# Altium PCB Development board.PcbDoc
Units mm, origin at the board's own origin, x right, y up, seen from the top; angles counter-clockwise.
Board outline 152.4 x 101.6 mm, 2 copper layers (Top Layer, Bottom Layer); 18 components, 42 nets, 183 pads, 9 vias.
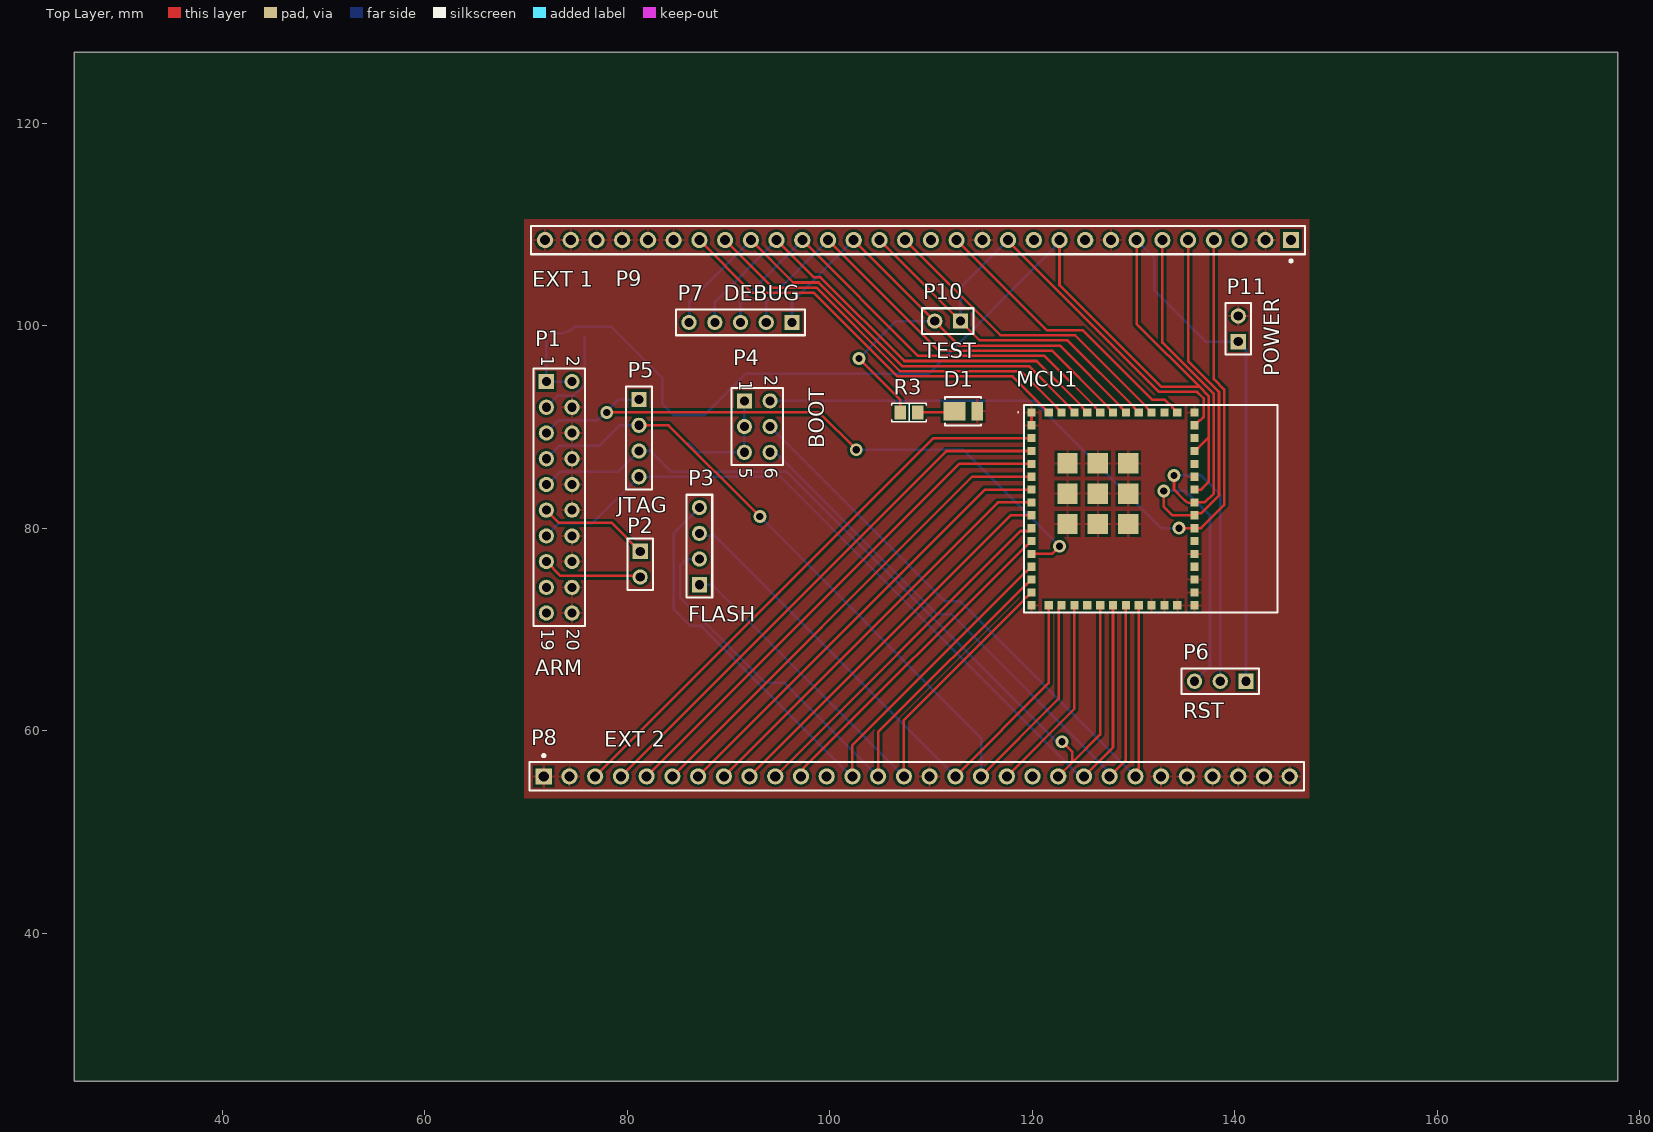
[diagram p0: Top Layer view]
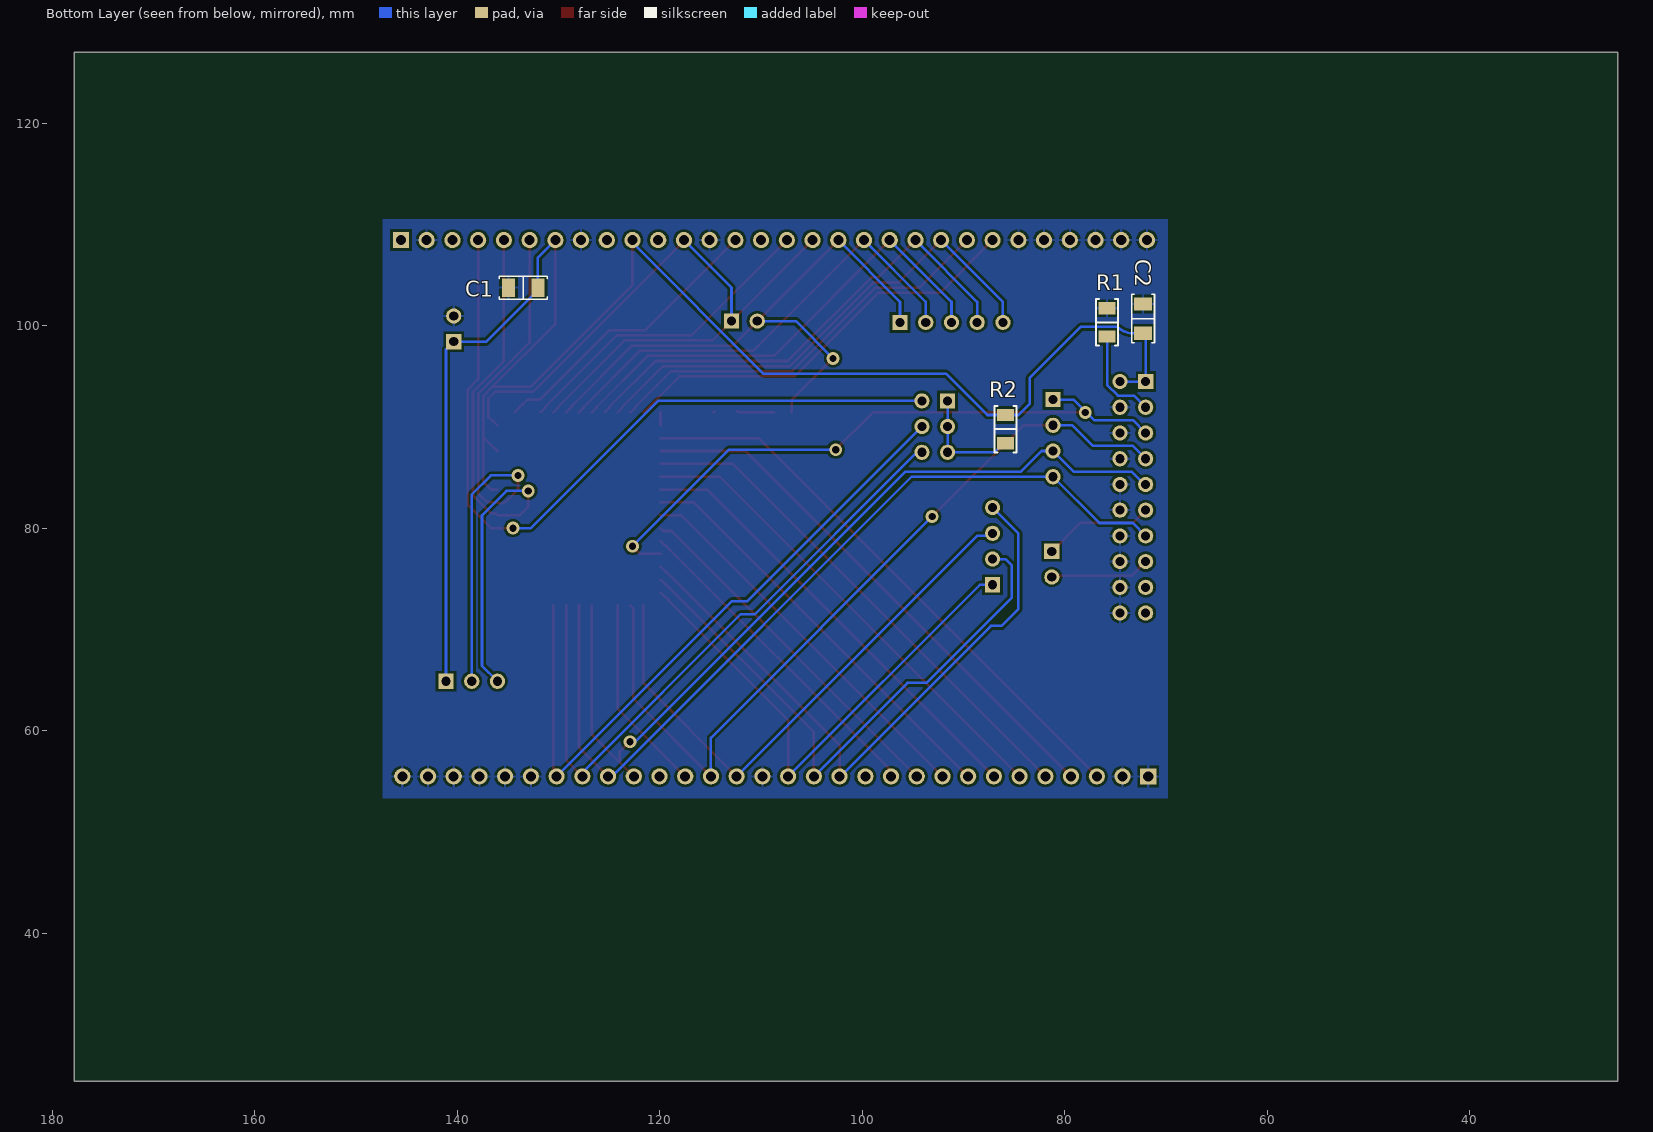
[diagram p1: Bottom Layer view, seen from below]
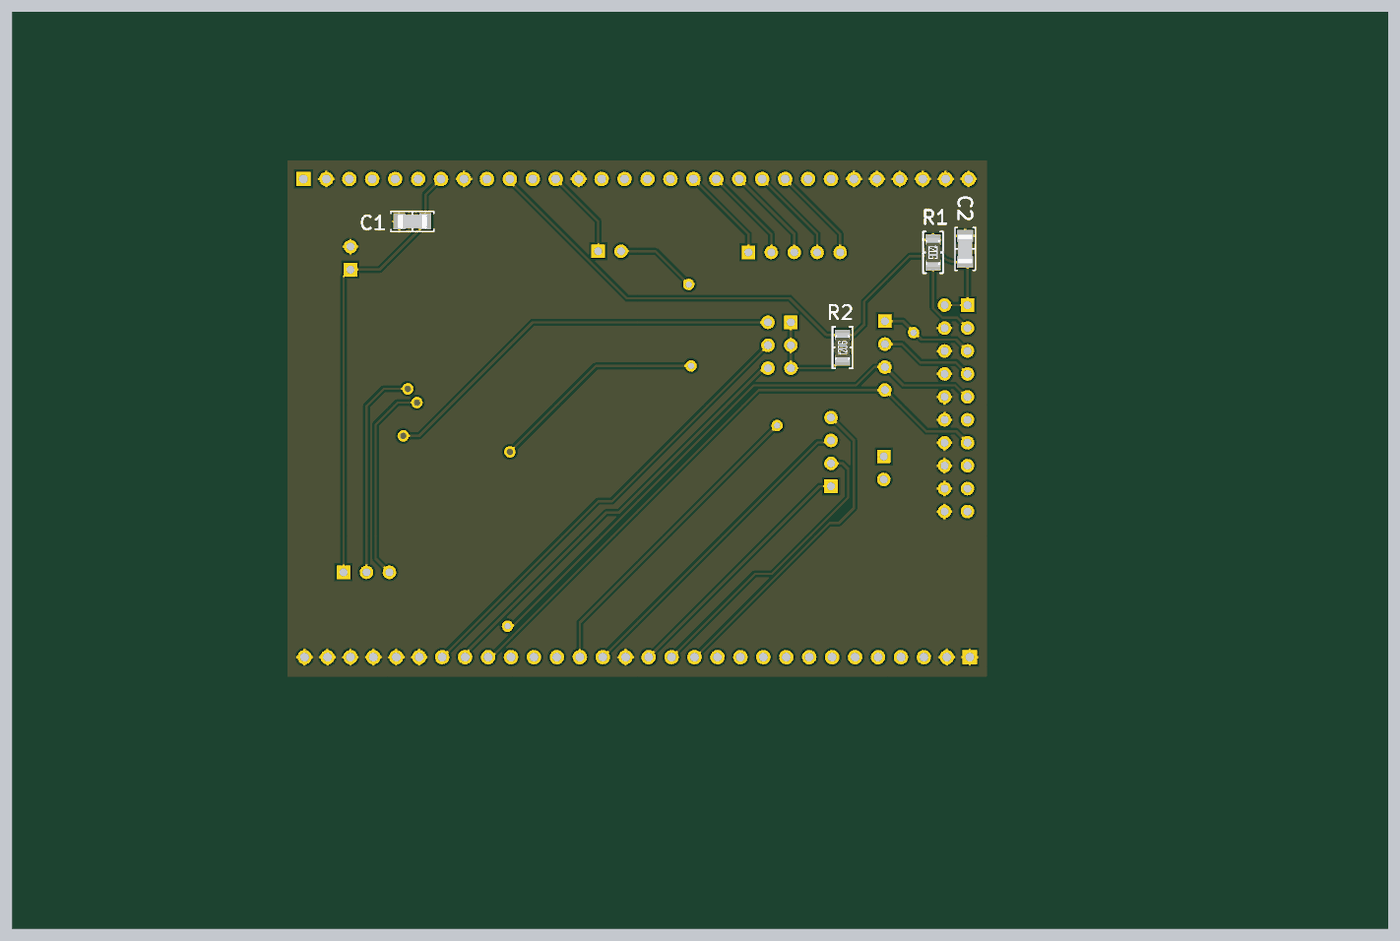
[diagram p2: 3D render of the assembled board from below, using the file's embedded part models]

## Layer stack, top to bottom
Top Solder: solder mask 0.0102, Solder Resist, Dk 3.5
Top Layer: signal copper 0.0356
Dielectric 1: dielectric 0.32, FR-4, Dk 4.8
Bottom Layer: signal copper 0.0356
Bottom Solder: solder mask 0.0102, Solder Resist, Dk 3.5

## Board outline
25.4,25.4 177.8,25.4 177.8,127 25.4,127

## Design rules (kind name [scope] priority, off if disabled: settings)
BoardOutlineClearance [All] p1: gap=0.2 ignorepadtopadclearanceinfootprint=FALSE except(0.4: Arc-SplitBarrior Arc-SplitContinuation Track-SplitBarrior Track-SplitContinuation SMDPad-SplitBarrior SMDPad-SplitContinuation THPad-SplitBarrior THPad-SplitContinuation Via-SplitBarrior Via-SplitContinuation Fill-SplitBarrior Fill-SplitContinuation Poly-SplitBarrior Poly-SplitContinuation Region-SplitBarrior Region-SplitContinuation Text-SplitBarrior Text-SplitContinuation)
Clearance "Clearance Bottom Layer" [OnLayer('Bottom Layer')] p1: gap=0.203 ignorepadtopadclearanceinfootprint=TRUE except(0.254: Arc-Text Track-Text SMDPad-Text THPad-Text Via-Text Fill-Text Poly-Text Region-Text Text-Text)
Clearance "Clearance Top Layer" [OnLayer('Top Layer')] p2: gap=0.203 ignorepadtopadclearanceinfootprint=TRUE except(0.254: Arc-Text Track-Text SMDPad-Text THPad-Text Via-Text Fill-Text Poly-Text Region-Text Text-Text)
Clearance [All] p3: gap=0.2 ignorepadtopadclearanceinfootprint=FALSE except(0.089: Arc-Arc Arc-Track Arc-SMDPad Track-Track Track-SMDPad SMDPad-SMDPad; 0.127: Arc-Via Track-Via SMDPad-Via THPad-Via Via-Via; 0.254: Arc-Text Track-Text SMDPad-Text THPad-Text Via-Text Fill-Text Poly-Text Region-Text Text-Text)
HoleSize [All] p1: absolutevalues=TRUE maxlimit=6.3 minlimit=0.2 maxpercent=80.000 minpercent=20.000
MinimumAnnularRing [All] p1: minimumring=0.076
MinimumSolderMaskSliver [All] p1: minsoldermaskwidth=0.1
PolygonConnect PolygonConnect_1 [All] p1: thpad.connectstyle=Relief thpad.reliefconductorwidth=0.508 thpad.reliefentries=4 thpad.polygonreliefangle="90 Angle" thpad.airgapwidth=0.254 smdpad.connectstyle=Relief smdpad.reliefconductorwidth=0.508 smdpad.reliefentries=4 smdpad.polygonreliefangle="90 Angle" smdpad.airgapwidth=0.254 via.connectstyle=Direct via.reliefconductorwidth=0.508 via.reliefentries=4 via.polygonreliefangle="90 Angle" via.airgapwidth=0.254
RoutingCorners [All] p1: cornerstyle=Round minsetback=2.54 maxsetback=2.54
RoutingVias [All] p1: holewidth=0.5 width=1 viastyle="Through Hole" minholewidth=0.2 minwidth=0.45 maxholewidth=1 maxwidth=2
SilkToSilkClearance [All] p1: silktosilkclearance=0.1
SilkToSolderMaskClearance [IsPad] p1: minsilkscreentomaskgap=0.1 clearancetoexposedcopper=TRUE
SolderMaskExpansion [All] p1: expansion=0.102 istentingtop=FALSE
Width [All] p1: maxlimit=2.54 minlimit=0.089 preferedwidth=0.381
25 further rules are at their usual default settings.

## Components (designator, comment, footprint, x,y, rotation, side; value= is the part's Value field where it differs from the comment)
C1 "0.1 µF" "CAP 1206_3216 - 0.8MM" 133.477,103.759 r180 bottom
C2 "0.1 µF" "CAP 1206_3216 - 0.8MM" 72.263,100.711 r270 bottom
D1 "RED" "CREE J 2835" 113.284,91.567 r180 top
MCU1 "CC3235MODASM2MONR" CC3235MODASF12MONR 131.686,81.915 r0 top
P1 "ARM" HDR2X10 72.009,94.488 r270 top
P2 "Header 2" HDR1X2 81.28,77.724 r270 top
P3 "FLASH" HDR1X4 87.122,74.422 r90 top
P4 "BOOT" HDR2X3 91.567,92.583 r270 top
P5 "JTAG" HDR1X4 81.153,92.71 r270 top
P6 "RST" HDR1X3 141.097,64.897 r180 top
P7 "DEBUG" HDR1X5 96.266,100.33 r180 top
P8 "EXT 2" HDR1X30 71.755,55.499 r0 top
P9 "EXT 1" HDR1X30 145.542,108.458 r180 top
P10 "TEST" HDR1X2 112.903,100.457 r180 top
P11 "POWER" HDR1X2 140.335,98.425 r90 top
R1 "10k" "RES 1206_3216" 75.819,100.33 r270 bottom value="1 kOhms"
R2 "10k" "RES 1206_3216" 85.852,89.789 r90 bottom value="1 kOhms"
R3 "1k" "RES 0805_2012" 107.823,91.44 r180 top

## Footprints (in the part's own frame and the unit in brackets; to place one, negate y for a bottom-side part, rotate by r counter-clockwise, add the part's x,y. Pads: shape width x height; smd on the part's side, far side on the other; paste and mask are expansions set on the pad)
"CAP 1206_3216 - 0.8MM" [mm] "Chip Capacitor, 2-Leads, Body 3.25x1.60mm, IPC Medium Density"
  rect 1.3x1.8 smd: 1(-1.45,0) 2(1.45,0)
  silkscreen extent -2.37,-1.12 2.37,1.12, body extent -1.6,-0.8 1.6,0.8, height 0.8
CC3235MODASF12MONR [mm]
  rect 0.81x0.81 smd: 1(-11.769,9.525) 2(-11.769,8.255) 3(-11.769,6.985) 4(-11.769,5.715) 5(-11.769,4.445) 6(-11.769,3.175) 7(-11.769,1.905) 8(-11.769,0.635) 9(-11.769,-0.635) 10(-11.769,-1.905) 11(-11.769,-3.175) 12(-11.769,-4.445) 13(-11.769,-5.715) 14(-11.769,-6.985) 15(-11.769,-8.255) 16(-11.769,-9.525) 17(-10.069,-9.525) 18(-8.799,-9.525) 19(-7.529,-9.525) 20(-6.259,-9.525) 21(-4.989,-9.525) 22(-3.719,-9.525) 23(-2.449,-9.525) 24(-1.179,-9.525) 25(0.091,-9.525) 26(1.361,-9.525) 27(2.631,-9.525) 28(4.331,-9.525) 29(4.331,-8.255) 30(4.331,-6.985) 31(4.331,-5.715) 32(4.331,-4.445) 33(4.331,-3.175) 34(4.331,-1.905) 35(4.331,-0.635) 36(4.331,0.635) 37(4.331,1.905) 38(4.331,3.175) 39(4.331,4.445) 40(4.331,5.715) 41(4.331,6.985) 42(4.331,8.255) 43(4.331,9.525) 44(2.631,9.524) 45(1.361,9.524) 46(0.091,9.524) 47(-1.179,9.524) 48(-2.449,9.524) 49(-3.719,9.524) 50(-4.989,9.524) 51(-6.259,9.524) 52(-7.529,9.524) 53(-8.799,9.524) 54(-10.069,9.524)
  rect 2x2 smd: 55(-8.219,4.5) 56(-8.219,1.5) 57(-8.219,-1.5) 58(-5.219,4.5) 59(-5.219,1.5) 60(-5.219,-1.5) 61(-2.219,4.5) 62(-2.219,1.5) 63(-2.219,-1.5)
  silkscreen extent -13.15,-10.25 12.5,10.25, body extent -12.5,-10.25 12.5,10.25, height 2.5
"CREE J 2835" [mm] "LED, 2-Leads, Body 3.5x2.8mm, CREE JE2835AWT-00-0000-000A0ZF627E"
  rect 2.2x1.8 smd: 1(0.962,0)
  rect 1.1x1.8 smd: 2(-1.278,0)
  silkscreen extent -1.64,-1.39 1.9,1.4, body extent -1.62,-1.4 1.9,1.4, height 0.7
HDR1X2 [mm] "Connector; Header; 2 Position"
  rect 1.5x1.5 hole 0.9: 1(0,0)
  round 1.5 hole 0.9: 2(2.54,0)
  silkscreen extent -1.27,-1.27 3.81,1.27
HDR1X3 [mm] "Connector; Header; 3 Position"
  rect 1.5x1.5 hole 0.9: 1(0,0)
  round 1.5 hole 0.9: 2(2.54,0) 3(5.08,0)
  silkscreen extent -1.27,-1.27 6.35,1.27
HDR1X4 [mm] "Connector; Header; 4 Position"
  rect 1.5x1.5 hole 0.9: 1(0,0)
  round 1.5 hole 0.9: 2(2.54,0) 3(5.08,0) 4(7.62,0)
  silkscreen extent -1.27,-1.27 8.89,1.27
HDR1X5 [mm] "Connector; Header; 5 Position"
  rect 1.5x1.5 hole 0.9: 1(0,0)
  round 1.5 hole 0.9: 2(2.54,0) 3(5.08,0) 4(7.62,0) 5(10.16,0)
  silkscreen extent -1.27,-1.27 11.43,1.27
HDR1X30 [mm] "Connector; Header; 30 Position"
  rect 1.6x1.6 hole 0.99: 1(0,0)
  round 1.6 hole 0.99: 2(2.54,0) 3(5.08,0) 4(7.62,0) 5(10.16,0) 6(12.7,0) 7(15.24,0) 8(17.78,0) 9(20.32,0) 10(22.86,0) 11(25.4,0) 12(27.94,0) 13(30.48,0) 14(33.02,0) 15(35.56,0) 16(38.1,0) 17(40.64,0) 18(43.18,0) 19(45.72,0) 20(48.26,0) 21(50.8,0) 22(53.34,0) 23(55.88,0) 24(58.42,0) 25(60.96,0) 26(63.5,0) 27(66.04,0) 28(68.58,0) 29(71.12,0) 30(73.66,0)
  silkscreen extent -1.4,-1.4 75.06,2.17
HDR2X3 [mm] "Connector; Header; 3x2 Position"
  rect 1.5x1.5 hole 0.9: 1(0,0)
  round 1.5 hole 0.9: 2(0,2.54) 3(2.54,0) 4(2.54,2.54) 5(5.08,0) 6(5.08,2.54)
  silkscreen extent -1.27,-1.27 6.35,3.81
HDR2X10 [mm] "Connector; Header; 10x2 Position"
  rect 1.5x1.5 hole 0.9: 1(0,0)
  round 1.5 hole 0.9: 2(0,2.54) 3(2.54,0) 4(2.54,2.54) 5(5.08,0) 6(5.08,2.54) 7(7.62,0) 8(7.62,2.54) 9(10.16,0) 10(10.16,2.54) 11(12.7,0) 12(12.7,2.54) 13(15.24,0) 14(15.24,2.54) 15(17.78,0) 16(17.78,2.54) 17(20.32,0) 18(20.32,2.54) 19(22.86,0) 20(22.86,2.54)
  silkscreen extent -1.27,-1.27 24.13,3.81
"RES 0805_2012" [mm] "Chip Resistor, 2-Leads, Body 2.00x1.25mm, IPC Medium Density"
  rect 1.15x1.35 smd: 1(-0.875,0) 2(0.875,0)
  silkscreen extent -1.7,-0.9 1.7,0.9, body extent -1,-0.62 1,0.63, height 0.6
"RES 1206_3216" [mm] "Chip Resistor, 2-Leads, Body 3.13x1.55mm, IPC Medium Density"
  rect 1.2x1.65 smd: 1(-1.4,0) 2(1.4,0)
  silkscreen extent -2.3,-1.1 2.3,1.1, body extent -1.6,-0.8 1.6,0.8, height 0.6

## Part data
C1 C2: library part CC1206MRX7R9BB104, "CAP CER 0.1UF 50V X7R 1206", Device Package="1206 (3216 Metric)", manufacturer=Yageo, Operating Temperature="-55°C ~ 125°C", Supplier Part Number 1=311-4502-1-ND, Temperature Coefficient=X7R, Tolerance=±20%, Voltage - Rated=50V, Applications="General Purpose", Capacitance="0.1 µF", componentlink1description=Datasheet, componentlink1url=http://www.yageo.com/NewPortal/_en/search/productDocs.jsp?YageoPartNumber=CC1206MRX7R9BB104, componentlink2description="DigiKey Link", componentlink2url=https://www.digikey.com/en/products/detail/yageo/CC1206MRX7R9BB104/5884665, lastupdated="21.03.2022 18:20:56", Lifecycle Status=Active, Minimum Order=1, Mounting Type="Surface Mount, MLCC", Package / Case="1206 (3216 Metric)", packaging=TapeAndReel, Part Number=CC1206MRX7R9BB104, Part Status=Active, partid=18893, price=0.02, series=CC, Size / Dimension="0.126\" L x 0.063\" W (3.20mm x 1.60mm)", Supplier 1=DigiKey, Thickness (Max)="0.037\" (0.95mm)"
D1: library part JE2835AWT-00-0000-000A0UF957E, "CREE J SERIES JE2835 LIGHT EMITT", CRI (Color Rendering Index)=90, Current - Max=240mA, Current - Test=150mA, Device Package="1113 (2835 Metric)", Flux @ 25°C, Current - Test="64lm (Typ)", Lumens/Watt @ Current - Test="142 lm/W", manufacturer="Cree Inc.", Supplier Device Package=SMD, Supplier Part Number 1=JE2835AWT-00-0000-000A0UF957ECT-ND, Voltage - Forward (Vf) (Typ)=3V, CCT (K)=5700K, componentlink1description=Datasheet, componentlink1url=https://www.cree.com/led-components/media/documents/data-sheet-JSeries-2835-3v.pdf, componentlink2description="DigiKey Link", componentlink2url=http://digikey.com/product-detail/en/cree-inc/JE2835AWT-00-0000-000A0UF957E/JE2835AWT-00-0000-000A0UF957ECT-ND/9974563, lastupdated="21.03.2022 19:13:25", Lifecycle Status=Active, Minimum Order=1, Mounting Type="Surface Mount", Package / Case="1113 (2835 Metric)", packaging=TapeAndReel, Part Number=JE2835AWT-00-0000-000A0UF957E, Part Status="1113 (2835 Metric)", partid=22, price=0.02, series=J, Supplier 1=DigiKey, Viewing Angle=120°
MCU1: "No Description Available", Mfr_Name="Texas Instruments", Copyright="Copyright (C) 2021 Ultra Librarian. All rights reserved.", Manufacturer_Part_Number=CC3235MODASM2MONR, RefDes=RefDes, Type=DEV
P1: library part "Header 20", "Header, 20-Pin", LatestRevisionDate=17-Jul-2002, LatestRevisionNote="Re-released for DXP Platform.", Publisher="Altium Limited"
P2: "Header, 2-Pin", LatestRevisionDate=17-Jul-2002, LatestRevisionNote="Re-released for DXP Platform.", Publisher="Altium Limited"
P3 P5: library part "Header 4", "Header, 4-Pin", LatestRevisionDate=17-Jul-2002, LatestRevisionNote="Re-released for DXP Platform.", Publisher="Altium Limited"
P4: library part "Header 3X2", "Header, 3-Pin, Dual row", LatestRevisionDate=17-Jul-2002, LatestRevisionNote="Re-released for DXP Platform.", Publisher="Altium Limited"
P6: library part "Header 3", "Header, 3-Pin", LatestRevisionDate=17-Jul-2002, LatestRevisionNote="Re-released for DXP Platform.", Publisher="Altium Limited"
P7: library part "Header 5", "Header, 5-Pin", LatestRevisionDate=17-Jul-2002, LatestRevisionNote="Re-released for DXP Platform.", Publisher="Altium Limited"
P8 P9: library part "Header 30", "Header, 30-Pin", LatestRevisionDate=17-Jul-2002, LatestRevisionNote="Re-released for DXP Platform.", Publisher="Altium Limited"
P10 P11: library part "Header 2", "Header, 2-Pin", LatestRevisionDate=17-Jul-2002, LatestRevisionNote="Re-released for DXP Platform.", Publisher="Altium Limited"
R1 R2: library part RNCS1206BKE1K00, "RES 1K OHM 0.1% 1/8W 1206", Device Package="1206 (3216 Metric)", manufacturer="Stackpole Electronics Inc", Operating Temperature="-55°C ~ 155°C", Power (Watts)="0.125W, 1/8W", Ratings=AEC-Q200, Resistance="1 kOhms", Supplier Device Package=1206, Supplier Part Number 1=RNCS1206BKE1K00CT-ND, Temperature Coefficient=±25ppm/°C, Tolerance=±0.1%, componentlink1description=Datasheet, componentlink1url=https://www.seielect.com/catalog/sei-rncs_rnch.pdf, componentlink2description="DigiKey Link", componentlink2url=https://www.digikey.com/en/products/detail/stackpole-electronics-inc/RNCS1206BKE1K00/1800333, Composition="Thin Film", Features="Anti-Corrosive, Automotive AEC-Q200, Moisture Resistant", Height - Seated (Max)="0.026\" (0.65mm)", lastupdated="21.03.2022 18:41:15", Lifecycle Status=Active, Minimum Order=1, Number of Terminations=2, Package / Case="1206 (3216 Metric)", packaging=TapeAndReel, Part Number=RNCS1206BKE1K00, Part Status=Active, partid=26856, price=0.09, series=RNCS, Size / Dimension="0.120\" L x 0.061\" W (3.05mm x 1.55mm)", Supplier 1=DigiKey
R3: library part CPF0805B1K0E, "RES SMD 1K OHM 0.1% 1/10W 0805", Device Package="0805 (2012 Metric)", manufacturer="TE Connectivity Passive Product", Operating Temperature="-55°C ~ 155°C", Power (Watts)="0.1W, 1/10W", Resistance="1 kOhms", Supplier Device Package=0805, Supplier Part Number 1=A106044CT-ND, Temperature Coefficient=±25ppm/°C, Tolerance=±0.1%, componentlink1description=Datasheet, componentlink1url=https://www.te.com/commerce/DocumentDelivery/DDEController?Action=srchrtrv&DocNm=1773200&DocType=DS&DocLang=English, componentlink2description="DigiKey Link", componentlink2url=https://www.digikey.com/en/products/detail/te-connectivity-passive-product/CPF0805B1K0E/2390399, Composition="Thin Film", Height - Seated (Max)="0.026\" (0.65mm)", lastupdated="21.03.2022 18:47:23", Lifecycle Status=Active, Minimum Order=1, Number of Terminations=2, Package / Case="0805 (2012 Metric)", packaging=TapeAndReel, Part Number=CPF0805B1K0E, Part Status=Active, partid=27725, price=0.10, series="CPF, Neohm", Size / Dimension="0.079\" L x 0.049\" W (2.00mm x 1.25mm)", Supplier 1=DigiKey

## Via types
v1: diameter 1.27, hole 0.711, Top Layer to Bottom Layer, 9 vias

## Nets (pads, with @x,y where several pads share a name; then routed paths per layer and width w, separated by ;. In a path a pad name is that pad's centre, name@x,y a point inside that pad or via, vN(x,y) a via of type N, cw(c..) or ccw(c..) an arc to the next point about the centre after c; other vN are vias at no path point)
+3.3V: C1.2 C2.2 MCU1.37 MCU1.40 P1.1 P1.2 P6.1 P9.7 P9.10 P11.1 R2.2 | length 173.2
  Top Layer w0.254: P9.10 122.682,104.013 132.715,93.98 136.485,93.98 ; P9.7 130.302,100.163 136.485,93.98 ; MCU1.37 136.654,83.82 136.803,83.969 137.414,84.58 137.414,88.948 ; MCU1.40 136.295,87.908 136.374,87.908 137.414,88.948 ; 136.485,93.98 137.414,93.051 137.414,88.948
  Bottom Layer w0.254: 73.266,99.261 C2.2 72.009,99.007 P1.1 P1.2 ; 73.267,99.261 ccw(c73.267,101.48) 74.836,99.911 78.397,99.911 83.439,94.869 83.439,92.329 84.579,91.189 R2.2 87.633,91.189 91.694,95.25 109.735,95.25 122.682,108.197 P9.10 ; P9.7 132.027,106.733 C1.2 132.027,103.509 137.111,98.425 P11.1 141.097,97.663 P6.1
GND: C1.1 C2.1 D1.2 MCU1.1 MCU1.2 MCU1.16 MCU1.25 MCU1.26 MCU1.27 MCU1.28 MCU1.29 MCU1.30 MCU1.32 MCU1.38 MCU1.43 MCU1.55 MCU1.56 MCU1.57 MCU1.58 MCU1.59 MCU1.60 MCU1.61 MCU1.62 MCU1.63 P1.4 P1.6 P1.8 P1.10 P1.12 P1.14 P1.16 P1.18 P1.20 P8.1 P8.2 P8.16 P8.25 P8.26 P8.27 P8.28 P8.29 P8.30 P9.2 P9.8 P9.13 P9.25 P9.26 P9.27 P9.28 P9.29 P9.30 P11.2 R1.1 | length 1.4
  Top Layer w0.254: D1.2 D1.2@114.689,91.44 ; MCU1.2 MCU1.1
NetD1_1: D1.1 R3.1 | length 3.7
  Top Layer w0.254: R3.1 112.195,91.44 D1.1
NetMCU1_3: MCU1.3 P8.3 | length 56.9
  Top Layer w0.254: P8.3 110.236,88.9 MCU1.3
NetMCU1_4: MCU1.4 P8.4 | length 53.9
  Top Layer w0.254: P8.4 111.506,87.63 MCU1.4
NetMCU1_5: MCU1.5 P8.5 | length 50.8
  Top Layer w0.254: P8.5 112.776,86.36 MCU1.5
NetMCU1_6: MCU1.6 P8.6 | length 47.7
  Top Layer w0.254: P8.6 114.046,85.09 MCU1.6
NetMCU1_7: MCU1.7 P8.7 | length 44.7
  Top Layer w0.254: P8.7 115.316,83.82 MCU1.7
NetMCU1_8: MCU1.8 P8.8 | length 41.6
  Top Layer w0.254: P8.8 116.586,82.55 MCU1.8
NetMCU1_9: MCU1.9 P8.9 | length 38.5
  Top Layer w0.254: P8.9 117.856,81.28 MCU1.9
NetMCU1_10: MCU1.10 P8.10 | length 35.5
  Top Layer w0.254: P8.10 118.848,79.732 119.639,79.732 MCU1.10
NetMCU1_11: MCU1.11 P8.11 | length 32.7
  Top Layer w0.254: P8.11 97.413,55.757 97.413,56.314 119.354,78.256 119.433,78.256 MCU1.11
NetMCU1_12: MCU1.12 P1.5 P5.1 | length 63.8
  Top Layer w0.254: v1(77.978,91.44) 98.933,91.44 v1(102.616,87.757) ; MCU1.12 121.92,77.47 v1(122.682,78.232)
  Bottom Layer w0.254: P1.5 73.279,90.678 77.089,90.678 79.121,92.71 P5.1 ; v1(102.616,87.757) 113.157,87.757 v1(122.682,78.232)
NetMCU1_13: MCU1.13 P3.4 P8.13 | length 63.6
  Top Layer w0.254: P8.13 102.235,58.597 119.354,75.716 119.433,75.716 MCU1.13
  Bottom Layer w0.254: P3.4 84.582,79.502 84.582,72.009 86.233,70.358 87.293,70.358 102.152,55.499 P8.13
NetMCU1_14: MCU1.14 P3.2 P8.14 | length 58
  Top Layer w0.254: P8.14 104.775,59.867 119.354,74.446 119.433,74.446 MCU1.14
  Bottom Layer w0.254: P3.2 85.852,76.962 85.217,76.327 85.217,73.152 93.643,64.726 95.548,64.726 P8.14
NetMCU1_15: MCU1.15 P3.1 P8.15 | length 51.5
  Top Layer w0.254: P8.15 107.315,61.058 119.131,72.874 119.131,72.953 119.354,73.176 119.433,73.176 MCU1.15
  Bottom Layer w0.254: P3.1 88.392,74.422 P8.15
NetMCU1_17: MCU1.17 P3.3 P8.17 | length 55.9
  Top Layer w0.254: P8.17 121.617,64.721 MCU1.17
  Bottom Layer w0.254: P3.3 87.347,79.277 88.617,79.277 P8.17
NetMCU1_18: MCU1.18 P1.7 P5.2 P8.18 | length 81.1
  Top Layer w0.254: P5.2 84.074,90.17 v1(93.091,81.153) ; P8.18 122.609,63.173 122.609,72.112 MCU1.18
  Bottom Layer w0.254: P1.7 73.279,88.138 77.216,88.138 79.248,90.17 P5.2 ; v1(93.091,81.153) 114.935,59.309 P8.18
NetMCU1_19: MCU1.19 P8.19 | length 19.7
  Top Layer w0.254: P8.19 124.157,62.181 MCU1.19
NetMCU1_21: MCU1.21 P1.9 P5.3 P8.21 | length 85.2
  Top Layer w0.254: P8.21 123.952,56.896 ; v1(122.936,58.928) 123.952,57.912 123.952,56.896 ; MCU1.21 126.697,59.641 123.952,56.896
  Bottom Layer w0.254: P1.9 72.136,84.328 73.406,85.598 79.121,85.598 P5.3 82.296,87.63 84.328,85.598 95.714,85.598 122.384,58.928 v1(122.936,58.928)
NetMCU1_22: MCU1.22 P1.13 P5.4 P8.22 | length 85.8
  Top Layer w0.254: P8.22 127.967,58.371 MCU1.22
  Bottom Layer w0.254: P1.13 73.279,80.518 76.581,80.518 P5.4 95.123,85.09 124.323,55.89 124.34,55.89 124.731,55.499 P8.22
NetMCU1_23: MCU1.23 P4.6 P8.23 | length 64.6
  Top Layer w0.254: P8.23 129.237,57.101 MCU1.23
  Bottom Layer w0.254: P4.6 94.345,87.265 94.853,87.265 110.607,71.511 112.004,71.511 127.244,56.271 127.244,56.254 127.635,55.863 P8.23
NetMCU1_24: MCU1.24 P4.4 P8.24 | length 67.4
  Top Layer w0.254: P8.24 130.433,55.757 130.433,56.246 130.507,56.321 MCU1.24
  Bottom Layer w0.254: P4.4 111.369,72.781 112.893,72.781 P8.24
NetMCU1_34: MCU1.34 P4.2 P9.4 | length 77.6
  Top Layer w0.254: v1(134.493,80.01) MCU1.34 136.023,80.016 136.658,80.016 138.938,82.296 138.938,93.726 137.922,94.742 P9.4
  Bottom Layer w0.254: P4.2 120.142,92.583 132.715,80.01 v1(134.493,80.01)
NetMCU1_35: MCU1.35 P6.3 P9.5 | length 57.2
  Top Layer w0.254: v1(132.969,83.693) 132.969,82.169 133.858,81.28 MCU1.35 136.204,81.467 136.654,81.467 138.43,83.243 138.43,93.472 135.382,96.52 P9.5
  Bottom Layer w0.254: v1(132.969,83.693) 135.128,83.693 137.541,81.28 137.541,66.421 P6.3
NetMCU1_36: MCU1.36 P6.2 P9.6 | length 57.1
  Top Layer w0.254: P9.6 132.842,98.342 137.922,93.262 137.922,83.453 137.019,82.55 MCU1.36 135.965,82.529 135.839,82.476 135.789,82.456 cw(c135.789,83.518) 135.038,82.767 135.037,82.768 133.985,83.82 v1(133.985,85.217)
  Bottom Layer w0.254: v1(133.985,85.217) 136.652,85.217 138.557,83.312 P6.2
NetMCU1_42: MCU1.42 P9.12 P10.1 | length 38.9
  Top Layer w0.254: P9.12 117.602,108.375 132.505,93.472 136.275,93.472 136.906,92.841 136.906,90.98 136.58,90.654 136.501,90.654 MCU1.42
  Bottom Layer w0.254: P10.1 112.903,103.759 P9.12
NetMCU1_44: MCU1.44 P9.14 | length 28.9
  Top Layer w0.254: P9.14 121.412,99.568 124.968,99.568 131.826,92.71 133.046,92.71 133.531,92.225 133.61,92.225 133.833,92.002 133.833,91.923 MCU1.44
NetMCU1_46: MCU1.46 P9.16 | length 31.4
  Top Layer w0.254: P9.16 116.84,99.06 124.235,99.06 131.293,92.002 131.293,91.923 MCU1.46
NetMCU1_47: MCU1.47 P9.17 | length 32.7
  Top Layer w0.254: P9.17 114.808,98.552 123.473,98.552 130.023,92.002 130.023,91.923 MCU1.47
NetMCU1_48: MCU1.48 P7.1 P9.18 | length 44.6
  Top Layer w0.254: P9.18 112.776,98.044 122.711,98.044 128.753,92.002 128.753,91.923 MCU1.48
  Bottom Layer w0.254: P7.1 96.266,102.362 P9.18
NetMCU1_49: MCU1.49 P7.2 P9.19 | length 45.9
  Top Layer w0.254: P9.19 103.538,104.742 110.744,97.536 121.949,97.536 127.483,92.002 127.483,91.923 MCU1.49
  Bottom Layer w0.254: P7.2 93.726,102.362 P9.19
NetMCU1_50: MCU1.50 P7.3 P9.20 | length 47.2
  Top Layer w0.254: P9.20 108.712,97.028 121.187,97.028 126.213,92.002 126.213,91.923 MCU1.50
  Bottom Layer w0.254: P7.3 91.186,102.362 P9.20
NetMCU1_51: MCU1.51 P7.4 P9.21 | length 48.4
  Top Layer w0.254: P9.21 98.425,104.775 99.1,104.775 107.355,96.52 120.425,96.52 124.943,92.002 124.943,91.923 MCU1.51
  Bottom Layer w0.254: P7.4 88.646,102.362 P9.21
NetMCU1_52: MCU1.52 P7.5 P9.22 | length 49.7
  Top Layer w0.254: P9.22 96.393,104.267 98.889,104.267 107.144,96.012 119.663,96.012 123.673,92.002 123.673,91.923 MCU1.52
  Bottom Layer w0.254: P7.5 86.106,102.362 P9.22
NetMCU1_53: MCU1.53 P9.23 | length 40.3
  Top Layer w0.254: P9.23 94.363,103.757 98.681,103.757 106.934,95.504 118.901,95.504 122.403,92.002 122.403,91.923 MCU1.53
NetMCU1_54: MCU1.54 P9.24 | length 41.5
  Top Layer w0.254: P9.24 92.331,103.249 98.427,103.249 106.68,94.996 118.06,94.996 MCU1.54
NetP1_3: P1.3 R1.2 | length 9.5
  Bottom Layer w0.254: P1.3 73.164,93.103 74.763,93.103 75.819,94.159 R1.2
NetP1_11: P1.11 P2.1 | length 11.2
  Top Layer w0.254: P1.11 71.882,81.661 72.009,81.661 72.136,81.661 73.271,80.526 78.478,80.526 P2.1
NetP1_15: P1.15 P2.2 | length 9.9
  Top Layer w0.254: P1.15 73.418,75.299 81.165,75.299 P2.2
NetP4_1: P4.1 P4.3 P4.5 R2.1 | length 11.2
  Bottom Layer w0.254: R2.1 86.077,88.389 86.963,87.503 P4.5 P4.3 P4.1
NetP10_2: P10.2 R3.2 | length 16
  Top Layer w0.254: v1(102.87,96.774) 106.948,92.696 R3.2
  Bottom Layer w0.254: v1(102.87,96.774) 106.553,100.457 P10.2
pads on no net: MCU1.20 MCU1.31 MCU1.33 MCU1.39 MCU1.41 MCU1.45 P1.17 P1.19 P8.12 P8.20 P9.1 P9.3 P9.9 P9.11 P9.15

## Polygon pours and split planes (outlines as drawn)
GND on Top Layer "GND_L01_P000" (solid, pour order 0): 69.85,110.49 147.32,110.49 147.32,53.34 69.85,53.34
GND on Bottom Layer "GND_L02_P001" (solid, pour order 1): 69.85,110.49 147.32,110.49 147.32,53.34 69.85,53.34

## Silkscreen, mask and mechanical layers (free items; w line width, h text height)
Mechanical 1:
  lines w0.254: 69.85,53.34 147.32,53.34 147.32,110.49 69.85,110.49 69.85,53.34

## Text inside footprints (layer, text, board x,y; h text height)
P1: Top Overlay "20" at 74.041,70.104 h1.27 r270; Top Overlay "19" at 71.501,70.104 h1.27 r270; Top Overlay "1" at 71.501,97.028 h1.27 r270; Top Overlay "2" at 74.041,97.028 h1.27 r270
P4: Top Overlay "1" at 91.059,94.615 h1.27 r270; Top Overlay "2" at 93.599,95.123 h1.27 r270; Top Overlay "5" at 91.059,85.979 h1.27 r270; Top Overlay "6" at 93.599,85.979 h1.27 r270